# Altium PCB PCB_PRACTICE.PcbDoc
Units mil, origin at the board's own origin, x right, y up, seen from the top; angles counter-clockwise.
Board outline 1653.54 x 1358.27 mil, 2 copper layers (Top Layer, Bottom Layer); 13 components, 20 nets, 60 pads, 0 vias.
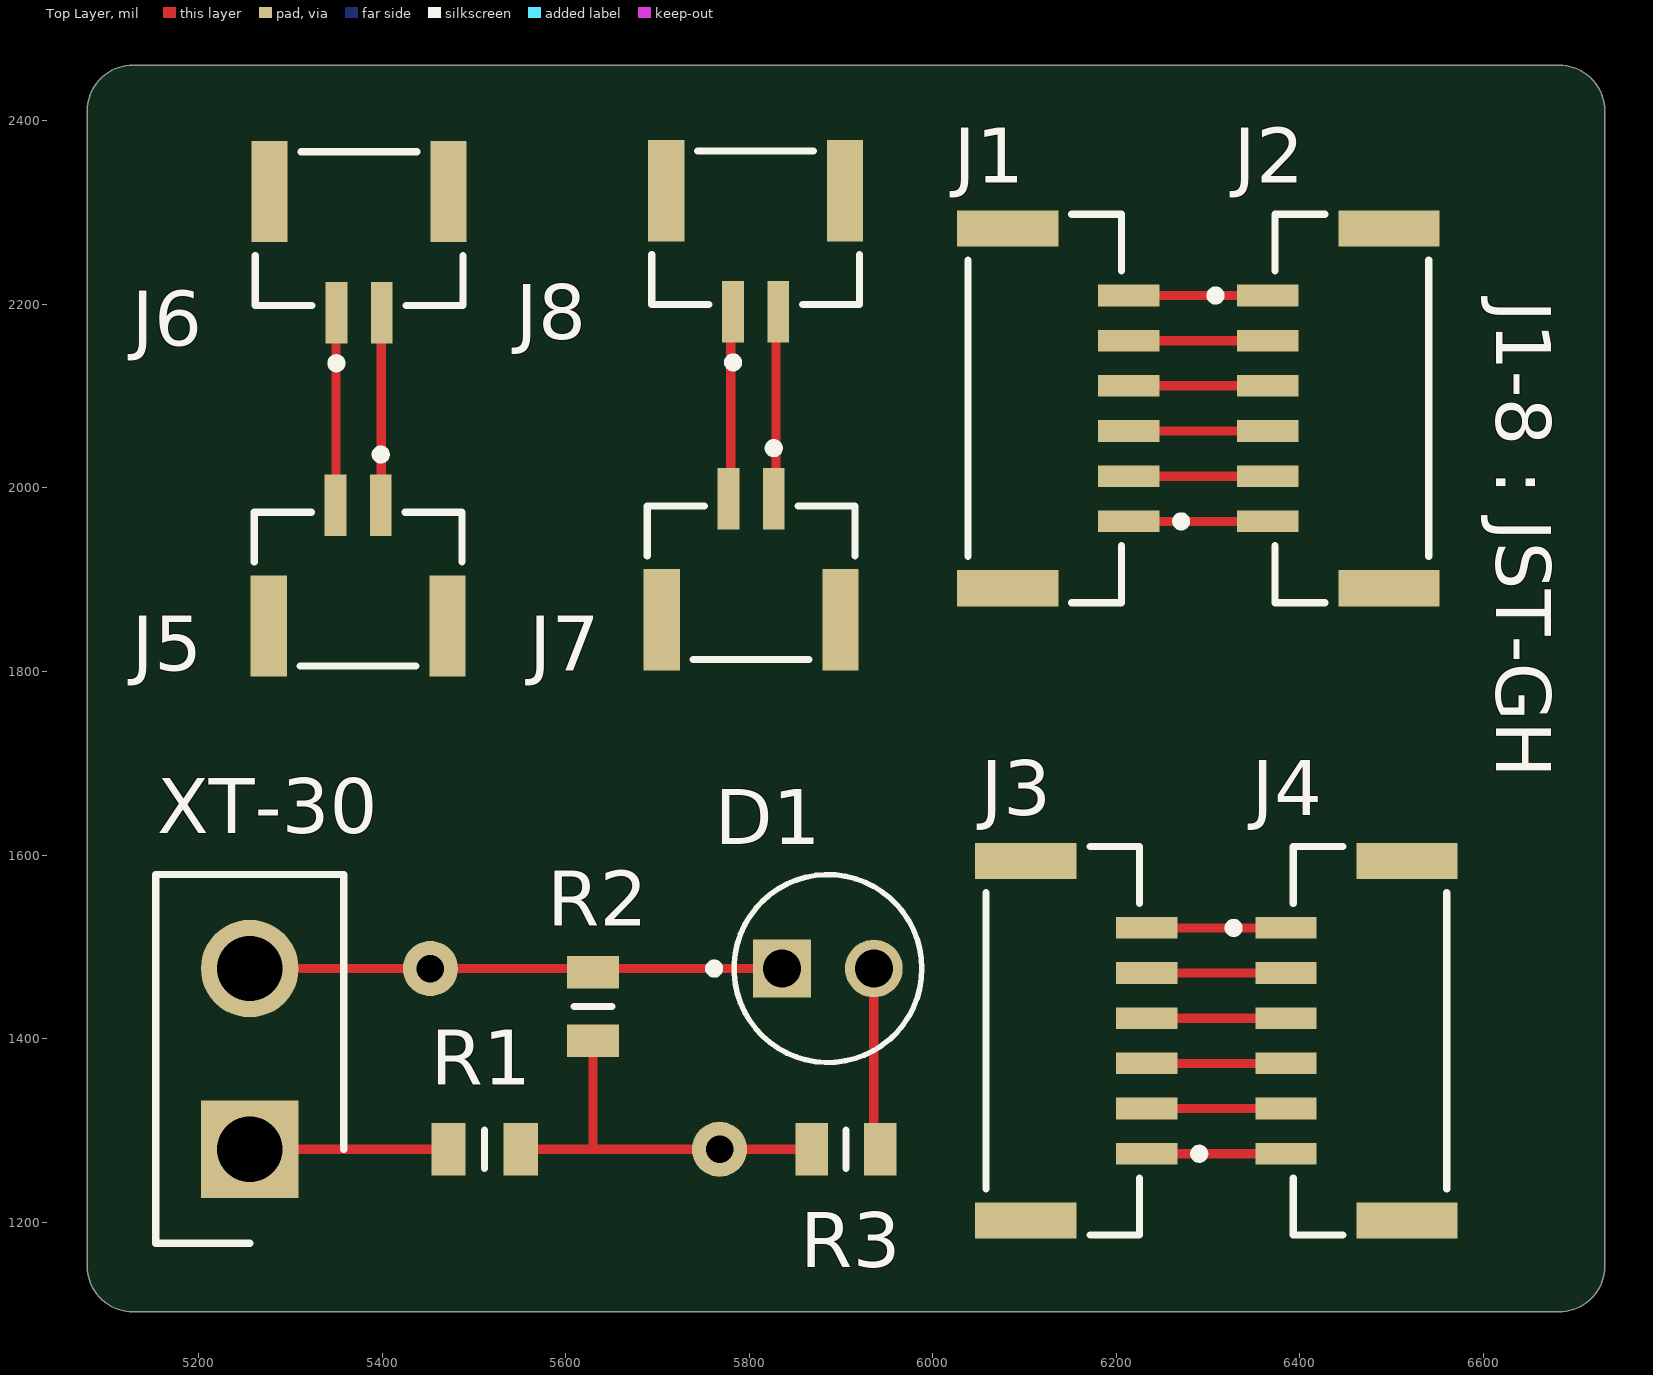
[diagram p0: Top Layer view]
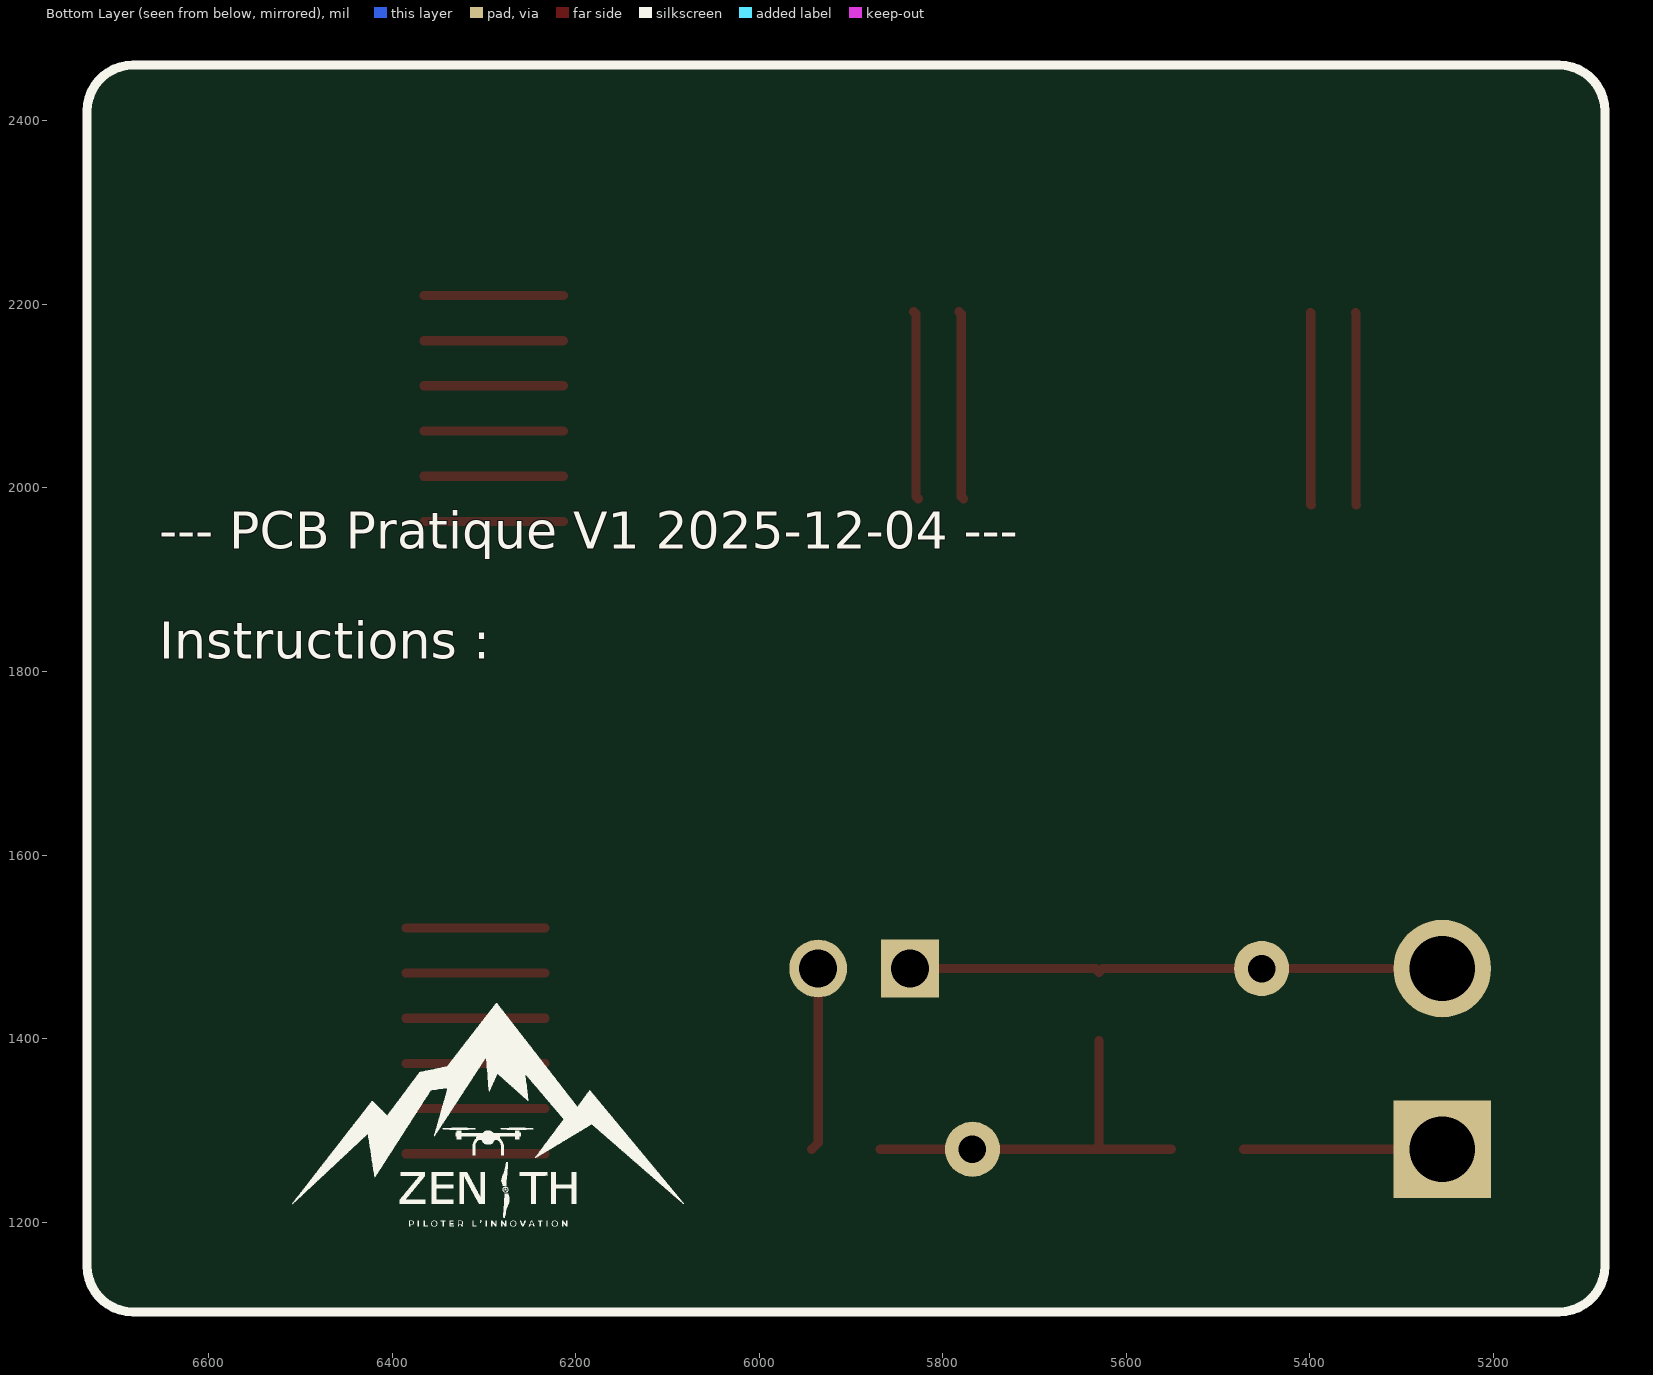
[diagram p1: Bottom Layer view, seen from below]
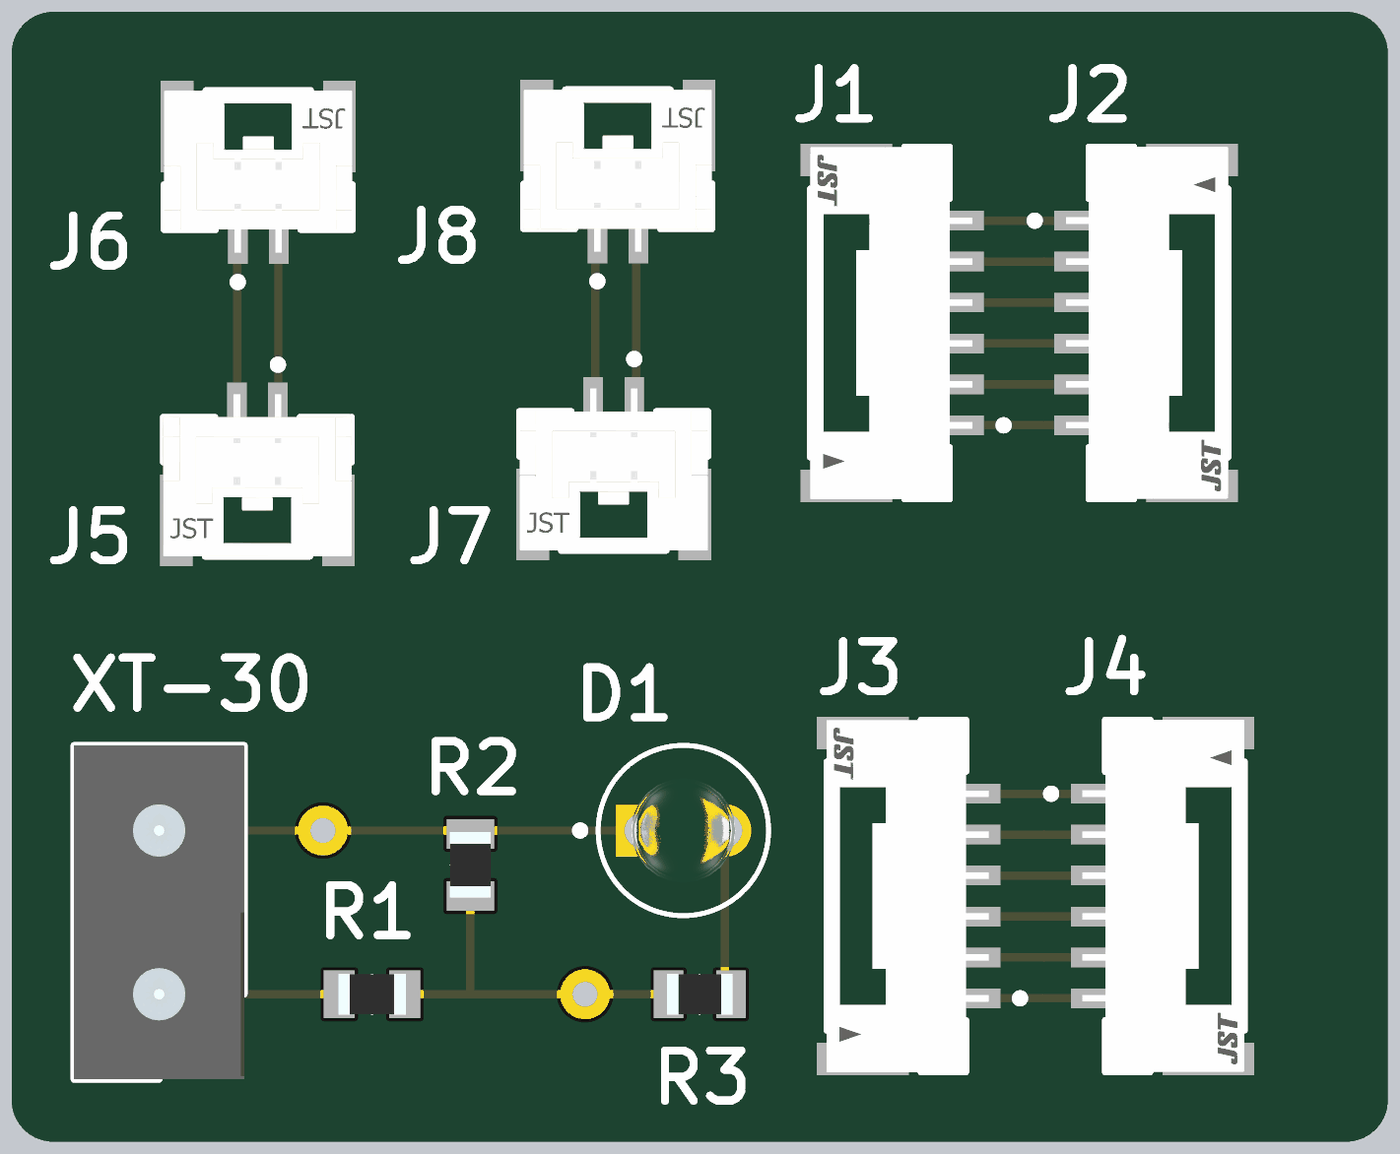
[diagram p2: 3D render of the assembled board from above, using the file's embedded part models]

## Layer stack, top to bottom
Top Solder: solder mask 0.4, Solder Resist, Dk 3.5
Top Layer: signal copper 1.4
Dielectric 1: dielectric 12.6, FR-4, Dk 4.8
Bottom Layer: signal copper 1.4
Bottom Solder: solder mask 0.4, Solder Resist, Dk 3.5

## Board outline
5078.74,1152.36 5078.74,2410.63 cw(c5128.74,2410.63) 5128.74,2460.63 6682.28,2460.63 cw(c6682.28,2410.63) 6732.28,2410.63 6732.28,1152.36 cw(c6682.28,1152.36) 6682.28,1102.36 5128.74,1102.36 cw(c5128.74,1152.36)

## Design rules (kind name [scope] priority, off if disabled: settings)
Clearance [All] p1: gap=10 ignorepadtopadclearanceinfootprint=FALSE
PolygonConnect [All] p1: connectstyle=Relief reliefconductorwidth=10 reliefentries=4 polygonreliefangle="90 Angle" airgapwidth=10
RoutingVias [All] p1: holewidth=28 width=50 viastyle="Through Hole" minholewidth=28 minwidth=50 maxholewidth=28 maxwidth=50
SolderMaskExpansion [All] p1: expansion=4 istentingtop=FALSE
SupplyNets "Schematic Supply Nets" [InNet('GND')] p1: voltage=0.000
Width [All] p1: maxlimit=10 minlimit=10 preferedwidth=10
30 further rules are at their usual default settings.

## Components (designator, comment, footprint, x,y, rotation, side; value= is the part's Value field where it differs from the comment)
D1 "TLLG4400-AS12" FP-6_544-5255_01-4-MFG 5885.83,1476.38 r0 top
J1 "BM06B-GHS-TBT(LF)(SN)" FP-BM06B-GHS-TBT_LF_SN-MFG 6122.05,2086.61 r90 top
J2 "BM06B-GHS-TBT(LF)(SN)" FP-BM06B-GHS-TBT_LF_SN-MFG 6456.69,2086.61 r270 top
J3 "BM06B-GHS-TBT(LF)(SN)" FP-BM06B-GHS-TBT_LF_SN-MFG 6141.73,1397.64 r90 top
J4 "BM06B-GHS-TBT(LF)(SN)" FP-BM06B-GHS-TBT_LF_SN-MFG 6476.38,1397.64 r270 top
J5 "BM02B-GHS-TBT(LF)(SN)(N)" FP-BM02B-GHS-TBT_LF_SN-MFG 5374.02,1889.76 r0 top
J6 "BM02B-GHS-TBT(LF)(SN)(N)" FP-BM02B-GHS-TBT_LF_SN-MFG 5375,2282.48 r180 top
J7 "BM02B-GHS-TBT(LF)(SN)(N)" FP-BM02B-GHS-TBT_LF_SN-MFG 5802.17,1896.65 r0 top
J8 "BM02B-GHS-TBT(LF)(SN)(N)" FP-BM02B-GHS-TBT_LF_SN-MFG 5807.09,2283.46 r180 top
R1 "10.2k" RESC2012X50N 5511.81,1279.53 r0 top
R2 "1.6K" RESC2012X60N 5629.92,1435.04 r270 top
R3 "750" RESC2012X60N 5905.51,1279.53 r0 top
XT-30 "XT30UPB-M" SHDR2W160P0X500_1X2_1020X520X1070P 5255.91,1279.53 r90 top (schematic designator X1)

## Footprints (in the part's own frame and the unit in brackets; to place one, negate y for a bottom-side part, rotate by r counter-clockwise, add the part's x,y. Pads: shape width x height; smd on the part's side, far side on the other; paste and mask are expansions set on the pad)
FP-6_544-5255_01-4-MFG [mm]
  rect 1.6x1.6 hole 1.05 paste-2539.97 mask+0: 1(-1.27,0)
  round 1.6 hole 1.05 paste-2539.97 mask+0: 2(1.27,0)
  silkscreen extent -3.27,-2.6 2.6,2.6, body extent -2.32,-2.32 2.32,2.32, height 0.25
FP-BM02B-GHS-TBT_LF_SN-MFG [mm]
  rect 0.6x1.7 smd paste+0 mask+0: 1(0.625,2.325) 2(-0.625,2.325)
  rect 1x2.8 smd paste+0 mask+0: 3(-2.475,-1.025) 4(2.475,-1.025)
  silkscreen extent -2.88,-2.12 2.88,3.85, body extent -3.08,-2.52 3.08,3.27, height 0.25
FP-BM06B-GHS-TBT_LF_SN-MFG [mm]
  rect 0.6x1.7 smd paste+0 mask+0: 1(-3.125,-2.325) 2(-1.875,-2.325) 3(-0.625,-2.325) 4(0.625,-2.325) 5(1.875,-2.325) 6(3.125,-2.325)
  rect 1x2.8 smd paste+0 mask+0: 7(-4.975,1.025) 8(4.975,1.025)
  silkscreen extent -5.38,-3.9 5.38,2.12, body extent -5.58,-3.27 5.58,2.52, height 0.25
RESC2012X50N [mm]
  rect 0.95x1.45 smd: 1(-1,0) 2(1,0)
  silkscreen extent 0,-0.53 0,0.53, body extent -1.02,-0.63 1.02,0.63, height 0.5
RESC2012X60N [mm]
  rect 0.9x1.45 smd: 1(-0.95,0) 2(0.95,0)
  silkscreen extent 0,-0.53 0,0.53, body extent -1,-0.63 1,0.63, height 0.6
SHDR2W160P0X500_1X2_1020X520X1070P [mm]
  rect 2.7x2.7 hole 1.8: 1(0,0)
  round 2.7 hole 1.8: 2(5,0)
  silkscreen extent -2.6,-2.6 7.6,2.6, body extent -2.6,-2.6 7.6,2.6, height 10.7

## Part data
D1: library part CMP-02520-000017-1, "LED GREEN DIFFUSED T-1 T/H", Case/Package=T, Color=Green, Forward Current=7mA, Forward Voltage=2.4V, Max Operating Temperature=100°C, Min Operating Temperature=-40°C, Power Dissipation=20mW, Reverse Voltage=20V, Test Current=2mA, Depth=3.2mm, Dominant Wavelength=575nm, Length=3.2mm, Lens Style=Diffused, Luminous Intensity=2mcd, Mount="Through Hole", Number of Elements=1, Number of LEDs=1, Number of Pins=2, Packaging="Tape and Reel", Radiation Hardening=No, RoHS Compliant=No, Viewing Angle=50°
J1 J2 J3 J4: library part CMP-17439-000166-1, "CONN HEADER SMD 6POS 1.25MM", Current Rating=1A, Housing Color=Natural, Voltage Rating=50V, Contact Material=Bronze, Housing Material=Nylon, Lead Free="Lead Free", Mount="Surface Mount", Number of Contacts=6, Number of Positions=6, Number of Rows=1, Orientation=Straight, Packaging="Cut Tape", Pitch=1.25mm, Series=GH, Termination=Solder
J5 J6 J7 J8: library part CMP-2000-05957-2, "CONN HEADER SMD 2POS 1.25MM", Color=Natural, Connector Type="Outer Shroud Contact", Contact Plating=Tin, Fastening Type=Ramp, Lead Free="Lead Free", Mount="Surface Mount", Number of Positions=2, Number of Rows=1, Packaging="Tape and Reel", Pitch=0.049inch, Termination=Solder
R1: library part CRCW080510K2FKEA, "Resistor", Manufacturer_Name=Vishay, Mouser Part Number=71-CRCW0805-10.2K-E3, Arrow Part Number=CRCW080510K2FKEA, Arrow Price/Stock=https://www.arrow.com/en/products/crcw080510k2fkea/vishay?region=nac, Datasheet Link=http://www.vishay.com/docs/20035/dcrcwe3.pdf, Height=0.5mm, Manufacturer_Part_Number=CRCW080510K2FKEA, Mouser Price/Stock=https://www.mouser.co.uk/ProductDetail/Vishay-Dale/CRCW080510K2FKEA?qs=LOX6nxTstibTXRK16X5NEQ%3D%3D
R2: library part CRCW08051K60FKEAC, "Resistor", Manufacturer_Name=Vishay, Mouser Part Number=71-CRCW08051K60FKEAC, Arrow Part Number=CRCW08051K60FKEAC, Arrow Price/Stock=https://www.arrow.com/en/products/crcw08051k60fkeac/vishay, Datasheet Link=https://www.arrow.com/en/products/crcw08051k60fkeac/vishay, Height=0.6mm, Manufacturer_Part_Number=CRCW08051K60FKEAC, Mouser Price/Stock=https://www.mouser.co.uk/ProductDetail/Vishay-Dale/CRCW08051K60FKEAC?qs=E3Y5ESvWgWMJaZYHQus8LQ%3D%3D
R3: library part CRCW0805750RFKEAHP, "Resistor", Manufacturer_Name=Vishay, Mouser Part Number=71-CRCW0805750RFKEAH, Arrow Part Number=CRCW0805750RFKEAHP, Arrow Price/Stock=https://www.arrow.com/en/products/crcw0805750rfkeahp/vishay?region=nac, Datasheet Link=https://componentsearchengine.com/Datasheets/1/CRCW08051R00FKEAHP.pdf, Height=0.6mm, Manufacturer_Part_Number=CRCW0805750RFKEAHP, Mouser Price/Stock=https://www.mouser.co.uk/ProductDetail/Vishay-Dale/CRCW0805750RFKEAHP?qs=40TFAHZMFvdp5ouInDDfaw%3D%3D
XT-30: "Connector", Manufacturer_Name=Amass, Datasheet Link=https://www.tme.eu/Document/4acc913878197f8c2e30d4b8cdc47230/XT30UPB%20SPEC.pdf, Height=10.7mm, Manufacturer_Part_Number=XT30UPB-M

## Free pads (board coordinates)
  round 60 hole 30: 7(5767.72,1279.53) 8(5452.76,1476.38)

## Nets (pads, with @x,y where several pads share a name; then routed paths per layer and width w, separated by ;. In a path a pad name is that pad's centre, name@x,y a point inside that pad or via, vN(x,y) a via of type N, cw(c..) or ccw(c..) an arc to the next point about the centre after c; other vN are vias at no path point)
GND: D1.1 pad.8 R2.1 XT-30.2 | length 583.2
  Top Layer w10: XT-30.2 5625.98,1476.38 R2.1 5633.86,1476.38 D1.1
NetD1_2: D1.2 R3.2 | length 199.8
  Top Layer w10: D1.2 5935.83,1286.61 R3.2
NetJ1_1: J1.1 J2.6 | length 151.6
  Top Layer w10: J1.1 J2.6
NetJ1_2: J1.2 J2.5 | length 151.6
  Top Layer w10: J1.2 J2.5
NetJ1_3: J1.3 J2.4 | length 151.6
  Top Layer w10: J1.3 J2.4
NetJ1_4: J1.4 J2.3 | length 151.6
  Top Layer w10: J1.4 J2.3
NetJ1_5: J1.5 J2.2 | length 151.6
  Top Layer w10: J1.5 J2.2
NetJ1_6: J1.6 J2.1 | length 151.6
  Top Layer w10: J1.6 J2.1
NetJ3_1: J3.1 J4.6 | length 151.6
  Top Layer w10: J3.1 J4.6
NetJ3_2: J3.2 J4.5 | length 151.6
  Top Layer w10: J3.2 J4.5
NetJ3_3: J3.3 J4.4 | length 151.6
  Top Layer w10: J3.3 J4.4
NetJ3_4: J3.4 J4.3 | length 151.6
  Top Layer w10: J3.4 J4.3
NetJ3_5: J3.5 J4.2 | length 151.6
  Top Layer w10: J3.5 J4.2
NetJ3_6: J3.6 J4.1 | length 151.6
  Top Layer w10: J3.6 J4.1
NetJ5_1: J5.1 J6.2 | length 210.1
  Top Layer w10: J5.1 5399.11,1981.79 5399.11,2190.45 J6.2
NetJ5_2: J5.2 J6.1 | length 210.1
  Top Layer w10: J5.2 5349.9,1981.79 5349.9,2190.45 J6.1
NetJ7_1: J7.1 J8.2 | length 205.8
  Top Layer w10: J7.1 5829.23,1990.65 5829.23,2189.47 J8.2
NetJ7_2: J7.2 J8.1 | length 205.8
  Top Layer w10: J7.2 5780.02,1990.65 5780.02,2189.47 J8.1
NetR1_1: R1.1 XT-30.1 | length 216.5
  Top Layer w10: XT-30.1 R1.1
NetR1_2: pad.7 R1.2 R2.2 R3.1 | length 435
  Top Layer w10: R1.2 5629.92,1279.53 ; R2.2 5629.92,1279.53 ; R3.1 5629.92,1279.53
pads on no net: J1.7 J1.8 J2.7 J2.8 J3.7 J3.8 J4.7 J4.8 J5.3 J5.4 J6.3 J6.4 J7.3 J7.4 J8.3 J8.4

## Silkscreen, mask and mechanical layers (free items; w line width, h text height)
Top Overlay:
  text "J1-8 : JST-GH" at 6614.17,2204.72 h60 r270
Bottom Overlay:
  drawing of 45 lines, arcs and shapes, not listed
  text "--- PCB Pratique V1 2025-12-04 --- /  / Instructions :  / 1- Souder le XT-30, puis les resistances selon l'ordre de leur etiquette et la DEL (D1). / 2- Souder les connecteurs JST-GH selon l'ordre de leur etiquette / 3- Tester la continuite et tester la DEL en alimentant par le XT-30" at 6653.54,1633.86 h40